# EAGLE board ProtoBlue (EAGLE 8.5.2)
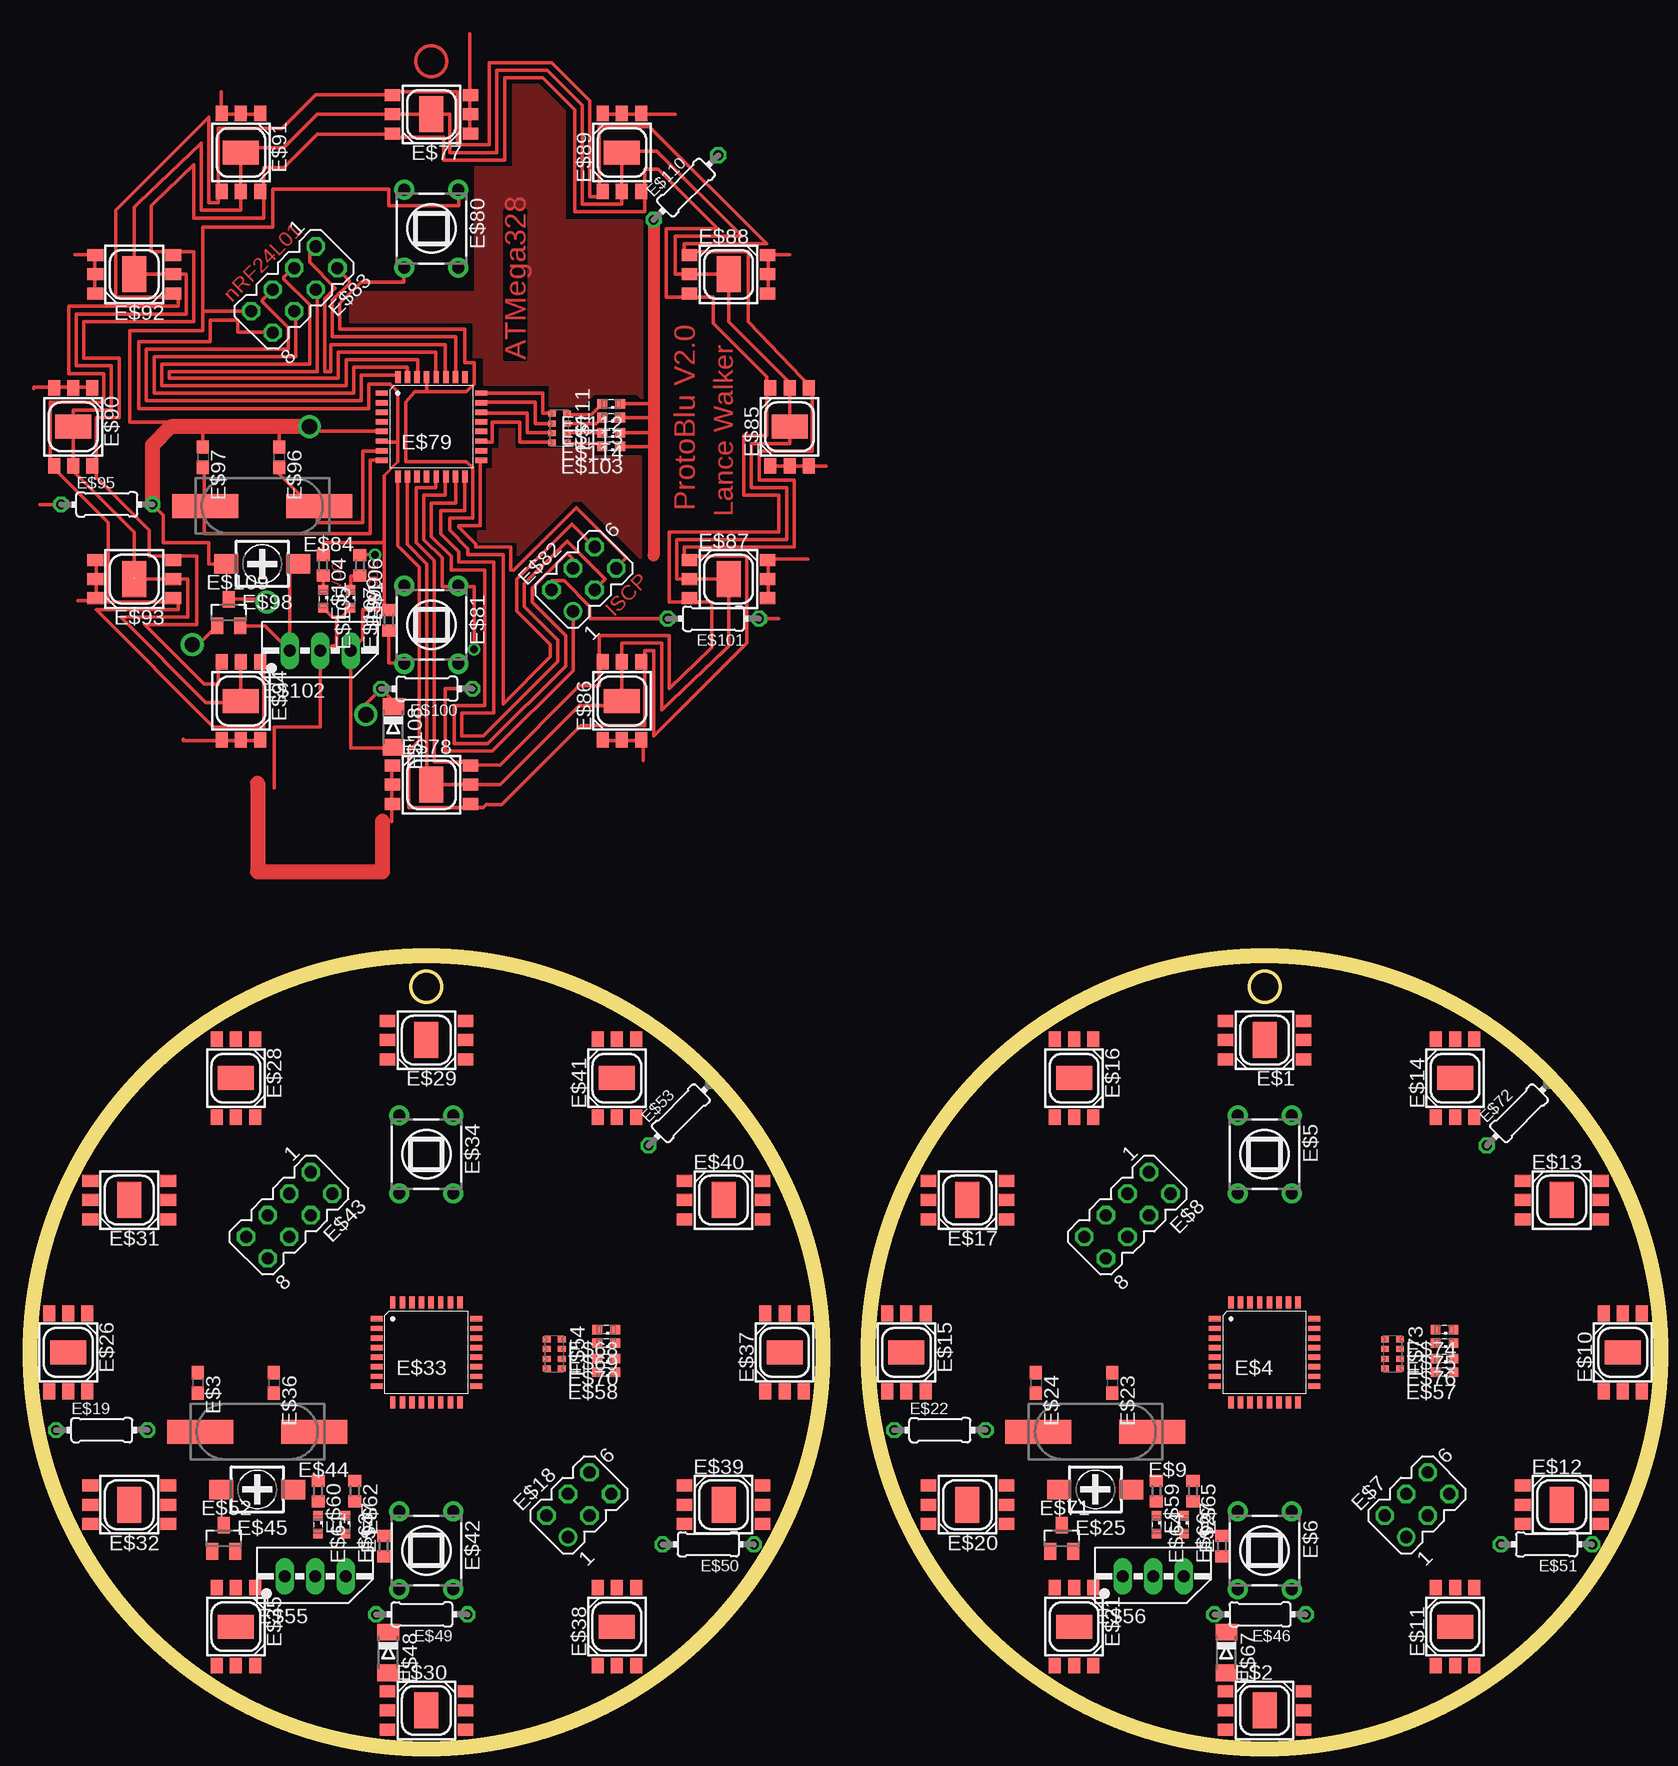
[diagram p0: board, top side]

No outline drawn. Coordinates in mm, seen from the top.
Copper layers (1*16): Top 0.035mm / dielectric 1.5mm / Bottom 0.035mm
Design rules "default": minimum track width 6mil, minimum drill 0.35mm, track to track 6mil, track to pad 6mil, pad to pad 6mil, via to via 6mil, smd to smd 6mil, copper to edge 40mil, drill to drill 6mil, minimum pad ring 10mil, minimum via ring 8mil, stop-mask expansion 4mil, vias tented up to drill 0mil, thermal gap 10mil
Milling: area 0,0 to 66,66; area 31.8,62.2 to 34.3,64.8; area 69.8,0 to 135.9,66; area 101.6,62.2 to 104.1,64.8

## Footprints (pad centres in the part's own frame; a part is rotated, then mirrored left to right if it is on the bottom)
LP2C63-ST-RGB-SR0 = smd 1.3 x 1: 1 -3.25,1.6; 2 -3.25,0; 3 -3.25,-1.6; 4 3.25,-1.6; 5 3.25,0; 6 3.25,1.6 | smd 2 x 3: TH 0,0
C0603 = smd 1.1 x 1: 1 -0.85,0; 2 0.85,0
VQFP32 = smd 1 x 0.45: 1 -4.15,2.8; 2 -4.15,2; 3 -4.15,1.2; 4 -4.15,0.4; 5 -4.15,-0.4; 6 -4.15,-1.2; 7 -4.15,-2; 8 -4.15,-2.8; 17 4.15,-2.8; 18 4.15,-2; 19 4.15,-1.2; 20 4.15,-0.4; 21 4.15,0.4; 22 4.15,1.2; 23 4.15,2; 24 4.15,2.8 | smd 0.45 x 1: 9 -2.8,-4.15; 10 -2,-4.15; 11 -1.2,-4.15; 12 -0.4,-4.15; 13 0.4,-4.15; 14 1.2,-4.15; 15 2,-4.15; 16 2.8,-4.15; 25 2.8,4.15; 26 2,4.15; 27 1.2,4.15; 28 0.4,4.15; 29 -0.4,4.15; 30 -1.2,4.15; 31 -2,4.15; 32 -2.8,4.15
TL1105SP = drill 1 pad 1.676: 1 -2.25,3.25; 2 2.25,3.25; 3 -2.25,-3.25; 4 2.25,-3.25
MA03-2 = drill 1.016: 1 -2.54,-1.27 | drill 1.016 octagon: 2 -2.54,1.27; 3 0,-1.27; 4 0,1.27; 5 2.54,-1.27; 6 2.54,1.27
MA04-2 = drill 1.016 octagon: 1 -3.81,-1.27; 2 -3.81,1.27; 3 -1.27,-1.27; 4 -1.27,1.27; 5 1.27,-1.27; 6 1.27,1.27; 7 3.81,-1.27; 8 3.81,1.27
CSM-7X-DU = smd 5.5 x 2: 1 -4.75,0; 2 4.75,0
0204/7 = drill 0.813 octagon: 1 -3.81,0; 2 3.81,0
3018_12 = smd 2 x 1.6: + -3,0; - 3,0
R0603 = smd 1 x 1.1: 1 -0.85,0; 2 0.85,0
MINIMELF = smd 1.4 x 1.8: A 1.7,0; C -1.7,0
SOT23 = smd 1 x 1.4: 1 -0.95,-1.1; 2 0.95,-1.1; 3 0,1.1
0603-ARC = smd 0.5 x 0.65: 1 -1.2,-0.625; 2 -0.4,-0.625; 3 0.4,-0.625; 4 1.2,-0.625; 5 1.2,0.625; 6 0.4,0.625; 7 -0.4,0.625; 8 -1.2,0.625
78MXXS = drill 1.016 long: GND 0,-2.54; IN -2.54,-2.54; OUT 2.54,-2.54
LED_SML0603 = smd 0.8 x 0.8: A 0.75,0; C -0.75,0

## Placement (x,y rotation side)
E$1  [LP2C63-ST-RGB-SR0]  102.87,59.05 180 top
E$2  [LP2C63-ST-RGB-SR0]  102.87,3.17 0 top
E$3  [C0603]  13.97,30.48 270 top
E$4  [VQFP32]  102.87,33.02 0 top
E$5  [TL1105SP]  102.87,49.53 180 top
E$6  [TL1105SP]  102.87,16.51 180 top
E$7  [MA03-2]  115.57,20.32 45 top
E$8  [MA04-2]  91.44,44.45 225 top
E$9  [CSM-7X-DU]  88.77,26.42 180 top
E$10  [LP2C63-ST-RGB-SR0]  132.72,33.02 90 top
E$11  [LP2C63-ST-RGB-SR0]  118.75,10.16 90 top
E$12  [LP2C63-ST-RGB-SR0]  127.64,20.32 0 top
E$13  [LP2C63-ST-RGB-SR0]  127.64,45.72 0 top
E$14  [LP2C63-ST-RGB-SR0]  118.75,55.88 90 top
E$15  [LP2C63-ST-RGB-SR0]  73.03,33.02 270 top
E$16  [LP2C63-ST-RGB-SR0]  87,55.88 270 top
E$17  [LP2C63-ST-RGB-SR0]  78.11,45.72 180 top
E$18  [MA03-2]  45.72,20.32 45 top
E$19  [0204/7]  5.97,26.54 0 top
E$20  [LP2C63-ST-RGB-SR0]  78.11,20.32 180 top
E$21  [LP2C63-ST-RGB-SR0]  87,10.16 270 top
E$22  [0204/7]  75.82,26.54 0 top
E$23  [C0603]  90.17,30.48 270 top
E$24  [C0603]  83.82,30.48 270 top
E$25  [3018_12]  88.77,21.59 180 top
E$26  [LP2C63-ST-RGB-SR0]  3.17,33.02 270 top
E$27  [R0603]  99.31,16.89 90 top
E$28  [LP2C63-ST-RGB-SR0]  17.14,55.88 270 top
E$29  [LP2C63-ST-RGB-SR0]  33.02,59.05 180 top
E$30  [LP2C63-ST-RGB-SR0]  33.02,3.17 0 top
E$31  [LP2C63-ST-RGB-SR0]  8.26,45.72 180 top
E$32  [LP2C63-ST-RGB-SR0]  8.26,20.32 180 top
E$33  [VQFP32]  33.02,33.02 0 top
E$34  [TL1105SP]  33.02,49.53 180 top
E$35  [LP2C63-ST-RGB-SR0]  17.14,10.16 270 top
E$36  [C0603]  20.32,30.48 270 top
E$37  [LP2C63-ST-RGB-SR0]  62.87,33.02 90 top
E$38  [LP2C63-ST-RGB-SR0]  48.9,10.16 90 top
E$39  [LP2C63-ST-RGB-SR0]  57.78,20.32 0 top
E$40  [LP2C63-ST-RGB-SR0]  57.78,45.72 0 top
E$41  [LP2C63-ST-RGB-SR0]  48.9,55.88 90 top
E$42  [TL1105SP]  33.02,16.51 180 top
E$43  [MA04-2]  21.59,44.45 225 top
E$44  [CSM-7X-DU]  18.92,26.42 180 top
E$45  [3018_12]  18.92,21.59 180 top
E$46  [0204/7]  102.49,11.18 180 top
E$47  [R0603]  29.46,16.89 90 top
E$48  [MINIMELF]  29.84,8 270 top
E$49  [0204/7]  32.64,11.18 180 top
E$50  [0204/7]  56.52,17.02 180 top
E$51  [0204/7]  126.36,17.02 180 top
E$52  [SOT23]  16.13,17.53 0 top
E$53  [0204/7]  54.23,52.96 45 top
E$54  [0603-ARC]  43.69,32.89 90 top
E$55  [78MXXS]  23.75,16.89 0 top
E$56  [78MXXS]  93.6,16.89 0 top
E$57  [LED_SML0603]  117.86,31.37 180 top
E$58  [LED_SML0603]  48.01,31.37 180 top
E$59  [R0603]  93.85,21.46 270 top
E$60  [R0603]  24,21.46 270 top
E$61  [LED_SML0603]  24,18.67 270 top
E$62  [R0603]  27.05,21.46 270 top
E$63  [LED_SML0603]  26.29,18.67 270 top
E$64  [LED_SML0603]  93.85,18.67 270 top
E$65  [R0603]  96.9,21.46 270 top
E$66  [LED_SML0603]  96.14,18.67 270 top
E$67  [MINIMELF]  99.69,8 270 top
E$68  [LED_SML0603]  48.01,34.92 180 top
E$69  [LED_SML0603]  48.01,33.78 180 top
E$70  [LED_SML0603]  48.01,32.51 180 top
E$71  [SOT23]  85.98,17.53 0 top
E$72  [0204/7]  124.08,52.96 45 top
E$73  [0603-ARC]  113.54,32.89 90 top
E$74  [LED_SML0603]  117.86,34.92 180 top
E$75  [LED_SML0603]  117.86,33.78 180 top
E$76  [LED_SML0603]  117.86,32.51 180 top
E$77  [LP2C63-ST-RGB-SR0]  33.44,136.22 180 top
E$78  [LP2C63-ST-RGB-SR0]  33.44,80.33 0 top
E$79  [VQFP32]  33.44,110.18 0 top
E$80  [TL1105SP]  33.44,126.69 180 top
E$81  [TL1105SP]  33.44,93.67 180 top
E$82  [MA03-2]  46.14,97.48 45 top
E$83  [MA04-2]  22.01,121.61 225 top
E$84  [CSM-7X-DU]  19.34,103.58 180 top
E$85  [LP2C63-ST-RGB-SR0]  63.28,110.18 90 top
E$86  [LP2C63-ST-RGB-SR0]  49.31,87.32 90 top
E$87  [LP2C63-ST-RGB-SR0]  58.2,97.48 0 top
E$88  [LP2C63-ST-RGB-SR0]  58.2,122.88 0 top
E$89  [LP2C63-ST-RGB-SR0]  49.31,133.04 90 top
E$90  [LP2C63-ST-RGB-SR0]  3.6,110.18 270 top
E$91  [LP2C63-ST-RGB-SR0]  17.57,133.04 270 top
E$92  [LP2C63-ST-RGB-SR0]  8.68,122.88 180 top
E$93  [LP2C63-ST-RGB-SR0]  8.68,97.48 180 top
E$94  [LP2C63-ST-RGB-SR0]  17.57,87.32 270 top
E$95  [0204/7]  6.39,103.7 0 top
E$96  [C0603]  20.74,107.64 270 top
E$97  [C0603]  14.39,107.64 270 top
E$98  [3018_12]  19.34,98.75 180 top
E$99  [R0603]  29.88,94.05 90 top
E$100  [0204/7]  33.06,88.34 180 top
E$101  [0204/7]  56.94,94.18 180 top
E$102  [78MXXS]  24.17,94.05 0 top
E$103  [LED_SML0603]  48.43,108.53 180 top
E$104  [R0603]  24.42,98.62 270 top
E$105  [LED_SML0603]  24.42,95.83 270 top
E$106  [R0603]  27.47,98.62 270 top
E$107  [LED_SML0603]  26.71,95.83 270 top
E$108  [MINIMELF]  30.27,85.16 270 top
E$109  [SOT23]  16.55,94.69 0 top
E$110  [0204/7]  54.65,130.12 45 top
E$111  [0603-ARC]  44.11,110.05 90 top
E$112  [LED_SML0603]  48.43,112.08 180 top
E$113  [LED_SML0603]  48.43,110.94 180 top
E$114  [LED_SML0603]  48.43,109.67 180 top

## Library data of the parts
E$1 E$2 E$10-E$17 E$20 E$21 E$26 E$28-E$32 E$35 E$37-E$41 E$77 E$78 E$85-E$94 = led
E$3 E$19 E$22-E$24 E$27 E$36 E$46 E$47 E$49-E$51 E$53 E$57-E$66 E$68-E$70 E$72 E$74-E$76 E$95-E$97 E$99-E$101 E$103-E$107 E$110 E$112-E$114 = eagle-ltspice
E$4 E$33 E$79 = atmel
E$5 E$6 E$34 E$42 E$80 E$81 = switch
E$7 E$8 E$18 E$43 E$82 E$83 = con-lstb
E$9 E$44 E$84 = crystal
E$25 E$45 E$98 = c-trimm
E$48 E$67 E$108 = ref-packages
E$52 E$71 E$109 = linear
E$54 E$73 E$111 = resistor-dil
E$55 E$56 E$102 = v-reg

## Nets
S$171: E$100.2
S$174: E$102.IN
S$175: E$95.2
S$204: E$95.1
S$216: E$102.OUT
S$217: E$100.1
S$218: E$101.1
S$219: E$101.2
S$238: E$102.GND

## Tracks (layer width: path | path; a pad name or v marks a point on that pad's centre or on a via)
S$1
  Top 0.152: 51.95,99.45 51.65,99.15
  Top 1: 51.95,127.45 51.95,99.45
S$171  (via drill 1.27)
  Top 0.305: 30.27,86.94 30.27,87.32 E$100.2 27.98,87.07 v27.98,86.18
S$172  (via drill 1.27)
  Top 0.305: v19.72,95.58 19.47,95.83 16.55,95.83
S$173  (via drill 1.27)
  Top 0.305: v13.5,92.02 14.01,92.02 15.53,93.54
S$174
  Top 0.305: 22.39,98.62 21.63,98.62 E$102.IN 19.6,93.54 17.44,93.54
S$175  (via drill 1.27)
  Top 0.305: E$95.2 11.09,102.81 11.09,100.53 14.9,100.53 14.9,98.75 16.3,98.75 | v23.28,110.18 23.66,109.8 29.5,109.8
  Top 1.27: v23.28,110.18 11.72,110.18 10.2,108.66 E$95.2
S$176
  Top 0.305: 6.52,95.58 12.36,95.58 12.36,94.94 5.5,94.94 15.28,85.16 19.47,85.16 19.47,91
S$177
  Top 0.305: 57.44,91.13 58.2,91.89 58.2,97.48 53.89,97.48 53.89,100.78 63.03,100.78 63.03,105.1 60.11,105.1 60.11,108.78 63.28,108.78 63.28,113.86 58.2,118.94 58.2,122.75 58.08,122.88 53.76,122.88 53.76,126.06 59.35,126.06 52.24,133.17 49.31,133.17 49.31,128.72 46.01,128.72 46.01,136.98 43.09,139.9 38.9,139.9 38.9,133.04 34.96,133.04 34.96,136.22 30.27,136.22 29.63,136.22 23.91,136.22 21.12,133.42 17.57,133.42 17.57,129.61
S$178
  Top 0.305: 56.3,91.26 56.81,91.77 56.81,95.58 53.25,95.58 53.25,101.42 62.4,101.42 62.4,104.47 59.48,104.47 59.48,109.42 61.38,109.42 61.38,114.37 56.94,118.82 56.94,120.97 53,120.97 53,126.69 57.32,126.69 52.36,131.64 51.22,131.64 51.22,128.09 45.38,128.09 45.38,136.6 42.71,139.26 39.54,139.26 39.54,132.41 34.46,132.41 34.46,134.31 30.01,134.31 30.01,134.56 | 19.47,129.48 19.47,131.77 21.12,131.77 23.91,134.56 30.01,134.56 | 30.14,134.56 30.01,134.56
S$179
  Top 0.305: 15.66,135.07 15.66,128.85 14.9,128.85 14.9,135.96 7.15,128.21 7.15,120.97 12.36,120.97
S$180
  Top 0.305: 17.57,133.42 17.57,128.21 14.26,128.21 14.26,133.8 9.06,128.85
S$181
  Top 0.305: 19.47,131.77 19.47,127.58 13.63,127.58 13.63,132.02 10.2,128.72
S$182
  Top 0.305: 12.36,122.88 8.68,122.88 8.68,127.83 8.68,128.47 9.44,129.23
S$183
  Top 0.305: 10.07,128.59 10.07,124.78 12.36,124.78
S$184
  Top 0.305: 7.15,120.97 12.36,120.97 12.36,120.21 3.21,120.21 3.21,114.62 6.13,114.62 6.13,112.21 1.69,112.21 1.69,106.5
S$185
  Top 0.305: 8.68,122.88 12.99,122.88 12.99,119.58 3.85,119.58 3.85,115.26 6.77,115.26 6.77,111.58 3.6,111.58 3.6,106.5
S$186
  Top 0.305: 10.07,124.78 13.63,124.78 13.63,118.94 4.48,118.94 4.48,115.89 7.41,115.89 7.41,110.94 5.5,110.94 5.5,106.5
S$187
  Top 0.305: 1.69,112.21 1.69,107 6.52,102.18 6.52,95.58 12.36,95.58
S$188  (1 unrouted)
  Top 0.305: 3.6,111.58 3.6,106.5 8.68,101.42 8.68,97.61 | 8.8,97.48 12.36,97.48
S$189
  Top 0.305: 5.5,110.94 5.5,105.99 9.95,101.54 9.95,99.39 12.36,99.39
S$190
  Top 0.305: 8.8,97.48 13.12,97.48 13.12,94.31 7.53,94.31 14.64,87.19 17.57,87.19 17.57,91
S$191
  Top 0.305: 9.95,99.39 13.88,99.39 13.88,93.67 9.56,93.67 14.52,88.72 15.66,88.72 15.66,91
S$192
  Top 0.305: 47.66,136.22 53.76,136.22
S$193
  Top 0.305: 61.51,121.23 61.51,124.53 63.28,124.53
S$194
  Top 0.305: 61.63,106.88 66.33,106.88
S$195
  Top 0.305: 61.51,95.96 61.51,99.13 64.81,99.13
S$196
  Top 0.305: 47.66,84.02 51.09,84.02 51.09,82.37
S$197
  Top 0.305: 30.14,81.86 30.14,77.29
S$198
  Top 0.305: 19.22,84.02 12.74,84.02 12.74,84.14
S$199
  Top 0.305: 5.5,99.13 5.5,95.7 3.98,95.7
S$200
  Top 0.305: 5.25,113.48 0.29,113.48 0.29,113.36
S$201
  Top 0.305: 5.37,121.23 5.37,124.53 3.72,124.53
S$202
  Top 0.305: 19.09,136.22 15.91,136.22 15.91,138.12
S$203
  Top 0.305: 36.62,134.56 36.62,142.95
S$204
  Top 0.305: E$95.1 0.8,103.7
S$205
  Top 0.305: 20.74,108.53 20.74,110.31
S$206
  Top 0.305: 14.39,108.53 14.39,110.31
S$207
  Top 0.305: 29.38,107.39 28.36,107.39 28.36,101.29 14.52,101.29 14.52,102.69 14.52,103.58 14.52,106.75
S$208
  Top 0.305: 29.25,108.15 27.73,108.15 27.73,102.18 23.91,102.18 23.91,103.07 | 23.91,103.07 23.91,103.58 | 23.91,103.07 20.74,106.24 20.74,106.75
S$209
  Top 0.305: 30.65,105.99 30.65,100.27 32.42,98.5 32.42,84.02 31.54,83.13 31.54,78.43 37.76,78.43 38.01,78.68 39.28,78.68 45.89,85.29 51.22,85.29 51.22,91.51 51.98,91.51 51.98,84.4 59.73,92.15 59.73,99.39 54.52,99.39 54.52,100.15 63.67,100.15 63.67,105.73 60.74,105.73 60.74,108.15 65.19,108.15 65.19,113.36 59.86,118.94 59.86,124.78 54.52,124.78 54.52,125.42 61.38,125.42 51.6,135.2 47.41,135.2 47.41,129.36 46.65,129.36 46.65,137.36 43.47,140.53 38.27,140.53 38.27,133.68 35.6,133.68 35.6,138.12 30.39,138.12 30.39,137.87 23.79,137.87 20.99,135.07 15.66,135.07 15.66,129.48
S$210
  Top 0.305: 57.82,91.51 52.62,86.56 52.62,92.15 49.31,92.15 49.31,86.94 45.76,86.94 39.16,80.33 36.36,80.33
S$211
  Top 0.305: 31.41,105.99 31.41,100.4 33.06,98.75 33.06,80.33 37.76,80.33
S$212
  Top 0.305: 33.82,105.99 33.82,105.1 32.17,105.1 32.17,100.53 33.69,99 33.69,82.24 36.62,82.24 36.62,81.99 39.16,81.99 45.76,88.59 47.41,88.59 47.41,92.78 53.25,92.78 53.25,88.34 56.68,91.64
S$213  (via drill 0.64)
  Top 0.305: 27.47,99.51 v28.74,99.51
S$214  (via drill 0.64)
  Top 0.305: 34.58,105.99 34.58,104.47 32.8,104.47 32.8,100.78 34.33,99.26 34.33,96.84 37,96.84 v37,91.64
S$215
  Top 0.305: 30.9,90.5 29.88,90.5 29.88,93.16
S$216
  Top 0.254: 29.5,106.12 30.65,107.26
  Top 0.305: 29.5,100.53 29.5,94.94 27.73,94.94 27.73,92.53 E$102.OUT 26.71,83.38 29.5,83.38 | 29.5,100.53 29.5,106.12 | 30.65,107.26 30.65,108.91 | 30.65,108.91 29,108.91 | 30.65,108.91 30.65,113.1 30.01,113.74 28.23,113.74 28.23,111.7 9.06,111.7 9.06,117.29 15.03,117.29 15.03,119.07 17.31,119.07 17.31,118.05 20.23,118.05 | 29.5,100.53 24.42,100.53 24.42,99.51
S$217
  Top 0.305: E$100.1 34.58,88.34 34.58,83.13 38.52,83.13 45.25,89.86 45.25,94.81
S$218
  Top 0.305: E$101.1 62.4,94.18
S$219
  Top 0.305: E$101.2 46.65,94.18 46.65,95.19 44.49,97.35 43.47,97.35 43.47,96.59
S$220
  Top 0.305: 48.81,98.37 49.7,99.26
S$221
  Top 0.305: 23.79,125.17 23.28,124.66 23.28,123.9 25.44,121.74
S$222
  Top 0.305: 20.23,121.61 19.34,120.72 19.34,120.59 21.5,118.44
S$223
  Top 0.305: 23.28,120.34 21.12,122.5 21.12,122.63 22.01,123.52
S$224
  Top 0.305: 36.23,106.24 36.23,103.19 34.2,103.19 34.2,101.29 35.73,99.77 35.73,98.88 38.65,98.88 38.65,86.3 35.98,86.3 35.98,84.4 37.76,84.4 43.98,90.62 43.98,92.4 41.19,95.19 41.19,97.1 44.74,100.66 47.92,97.48 47.03,96.59
S$225
  Top 0.305: 49.7,99.26 45.51,103.45 40.3,98.24 40.04,98.24 40.04,100.15 37.12,100.15 37.12,100.4 35.73,101.8 35.73,101.92 37.5,101.92 37.5,107.39 37.88,107.39
S$226
  Top 0.305: 47.03,100.15 45.12,102.05 40.55,97.48 40.55,94.81 43.35,92.02 43.35,91 39.41,87.07 39.41,99.51 36.49,99.51 36.49,100.02 34.96,101.54 34.96,102.56 36.87,102.56 36.87,106.75 36.36,107.26 31.28,107.26 31.28,112.21 32.04,113.1 33.06,113.1 | 33.06,113.1 33.06,114.5 | 33.06,113.1 36.36,113.1 37,113.74 37,115.51 36.23,115.51 36.23,118.31 25.82,118.31 25.82,120.47 27.6,122.25 31.15,122.25 31.15,123.52
S$227
  Top 0.305: 45.25,98.37 45.63,98.75 44.74,99.64 41.82,96.72 41.82,95.58 44.62,92.78 44.62,90.24 38.14,83.76 35.34,83.76 35.34,86.94 37.88,86.94 37.88,98.24 35.09,98.24 35.09,99.39 33.44,101.04 33.44,103.83 35.47,103.83 35.47,106.12
S$228
  Top 0.305: 18.45,119.83 14.39,119.83 | 14.39,119.83 14.39,118.18 8.29,118.18 8.29,110.56 12.87,110.56 | 14.39,119.83 14.39,126.82 20.23,126.82 20.23,129.99 29.88,129.99 29.88,128.59 35.73,128.59 35.73,129.99
S$229
  Top 0.305: 30.65,114.24 30.65,114.5 27.6,114.5 27.6,112.34 9.69,112.34 9.69,116.66 21.5,116.66 21.5,118.44
S$230
  Top 0.305: 31.41,114.24 31.41,115.13 26.96,115.13 26.96,112.97 10.33,112.97 10.33,116.02 22.14,116.02 22.14,119.83
S$231
  Top 0.305: 32.3,114.24 32.3,115.77 26.33,115.77 26.33,113.61 10.96,113.61 10.96,115.39 23.28,115.39 23.28,120.34
S$232
  Top 0.305: 33.82,114.24 33.82,116.4 25.69,116.4 25.69,114.24 11.6,114.24 11.6,114.75 23.91,114.75 23.91,121.61
S$233
  Top 0.305: 34.58,114.12 34.58,117.04 25.06,117.04 25.06,114.75 24.55,114.75 24.55,120.85 25.44,121.74
S$234
  Top 0.305: 35.47,114.24 35.47,117.67 25.18,117.67 25.18,120.72 26.58,122.12 26.58,122.37 25.57,123.39
S$235
  Top 0.305: 19.47,80.46 18.58,80.46
S$236
  Top 0.305: 24.42,97.73 24.42,96.59
S$237
  Top 0.305: 26.71,96.59 26.71,97.73 27.47,97.73
S$238
  Top 0.305: 24.42,95.07 25.18,94.31 25.57,94.31 | 26.71,95.07 25.95,94.31 25.57,94.31 | 20.36,80.08 20.36,85.16 24.17,85.16 E$102.GND 25.57,92.02 25.57,94.31
S$239
  Top 1.27: 18.96,80.46 18.96,73.1 29.38,73.1 29.38,77.29
S$240
  Top 0.305: 37.63,112.97 42.71,112.97 42.71,111.32 43.6,111.32
S$241
  Top 0.305: 37.63,112.21 42.08,112.21 42.08,110.43 43.47,110.43
S$242
  Top 0.305: 37.63,111.32 41.44,111.32 41.44,109.67 43.47,109.67
S$243
  Top 0.305: 37.63,108.91 38.52,108.91 38.52,110.56 40.81,110.56 40.81,108.91 43.6,108.91
S$245
  Top 0.305: 44.74,111.2 46.77,111.2 47.66,112.08
S$246
  Top 0.305: 44.74,110.43 47.16,110.43 47.66,110.94
S$247
  Top 0.305: 44.74,108.78 47.41,108.78 47.66,108.53
S$248
  Top 0.305: 44.74,109.67 47.79,109.67
S$249
  Top 0.305: 49.19,108.53 51.85,108.53
S$250
  Top 0.305: 49.19,109.67 51.73,109.67
S$251
  Top 0.305: 49.19,110.94 51.98,110.94
S$252
  Top 0.305: 49.19,112.08 51.98,112.08
S$253
  pour Top: 37.38,101.42 38.14,101.42 38.14,106.62 38.65,106.62 38.65,108.28 39.16,108.28 39.16,109.93 40.3,109.93 40.3,108.28 46.77,108.28 46.77,107.89 46.77,107.64 50.84,107.64 50.84,99.26 46.01,104.08 45.25,104.08 40.68,99.51 40.68,100.66 37.5,100.66 37.38,100.78
S$254
  pour Top: 50.97,112.59 50.97,127.33 44.49,127.33 44.49,136.47 42.33,138.63 40.3,138.63 40.3,131.77 37.12,131.77 37.12,121.74 37.12,121.36 27.73,121.36 26.71,120.34 26.71,118.94 37,118.94 37,116.02 37.88,116.02 37.88,113.74 43.35,113.74 43.35,111.96 46.01,111.96 47.03,112.97 50.59,112.97
(copper drawn outside any net)
  shapes: Top circle x1

## Text on the board
Top: nRF24L01 | ATMega328 | ProtoBlu V2.0 | Lance Walker | ISCP | VCC | MODE